# Altium PCB PCB1.PcbDoc
Units mil, origin at the board's own origin, x right, y up, seen from the top; angles counter-clockwise.
Board outline 2736.79 x 3920.6 mil, 2 copper layers (Top Layer, Bottom Layer); 85 components, 49 nets, 253 pads, 32 vias.
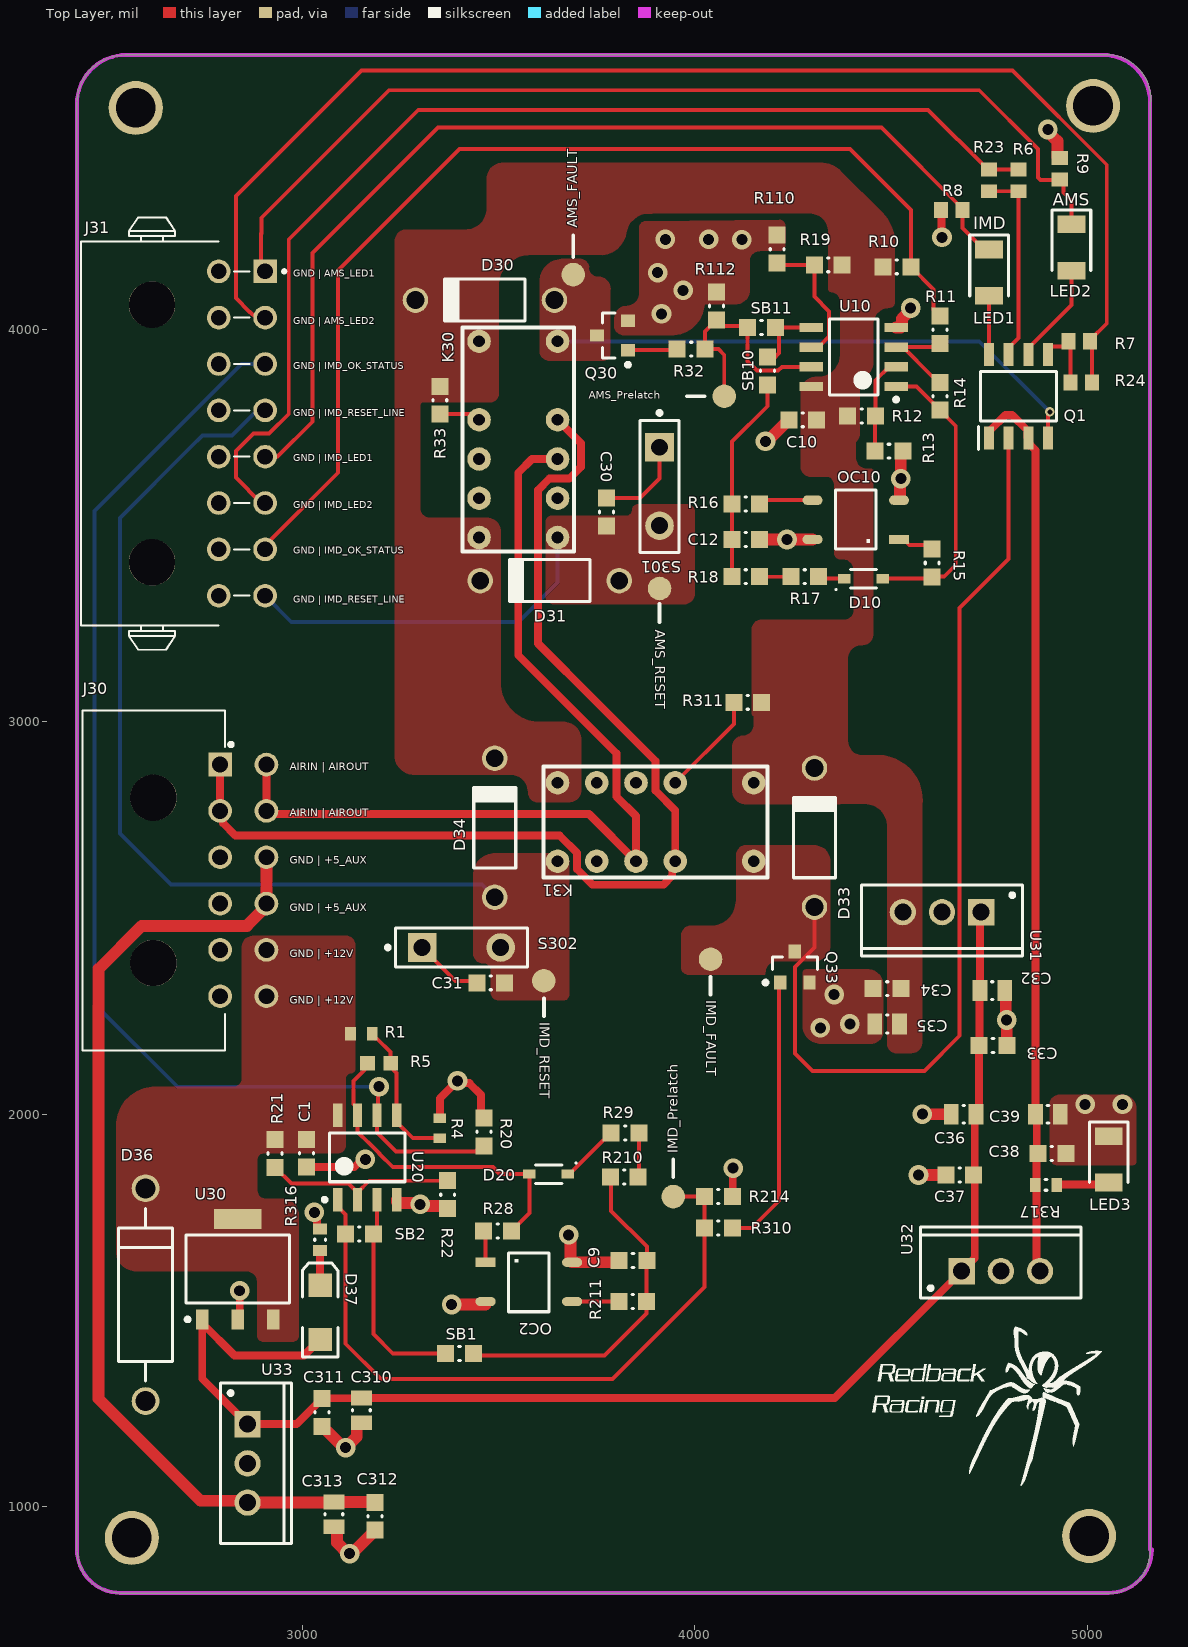
[diagram p0: Top Layer view]
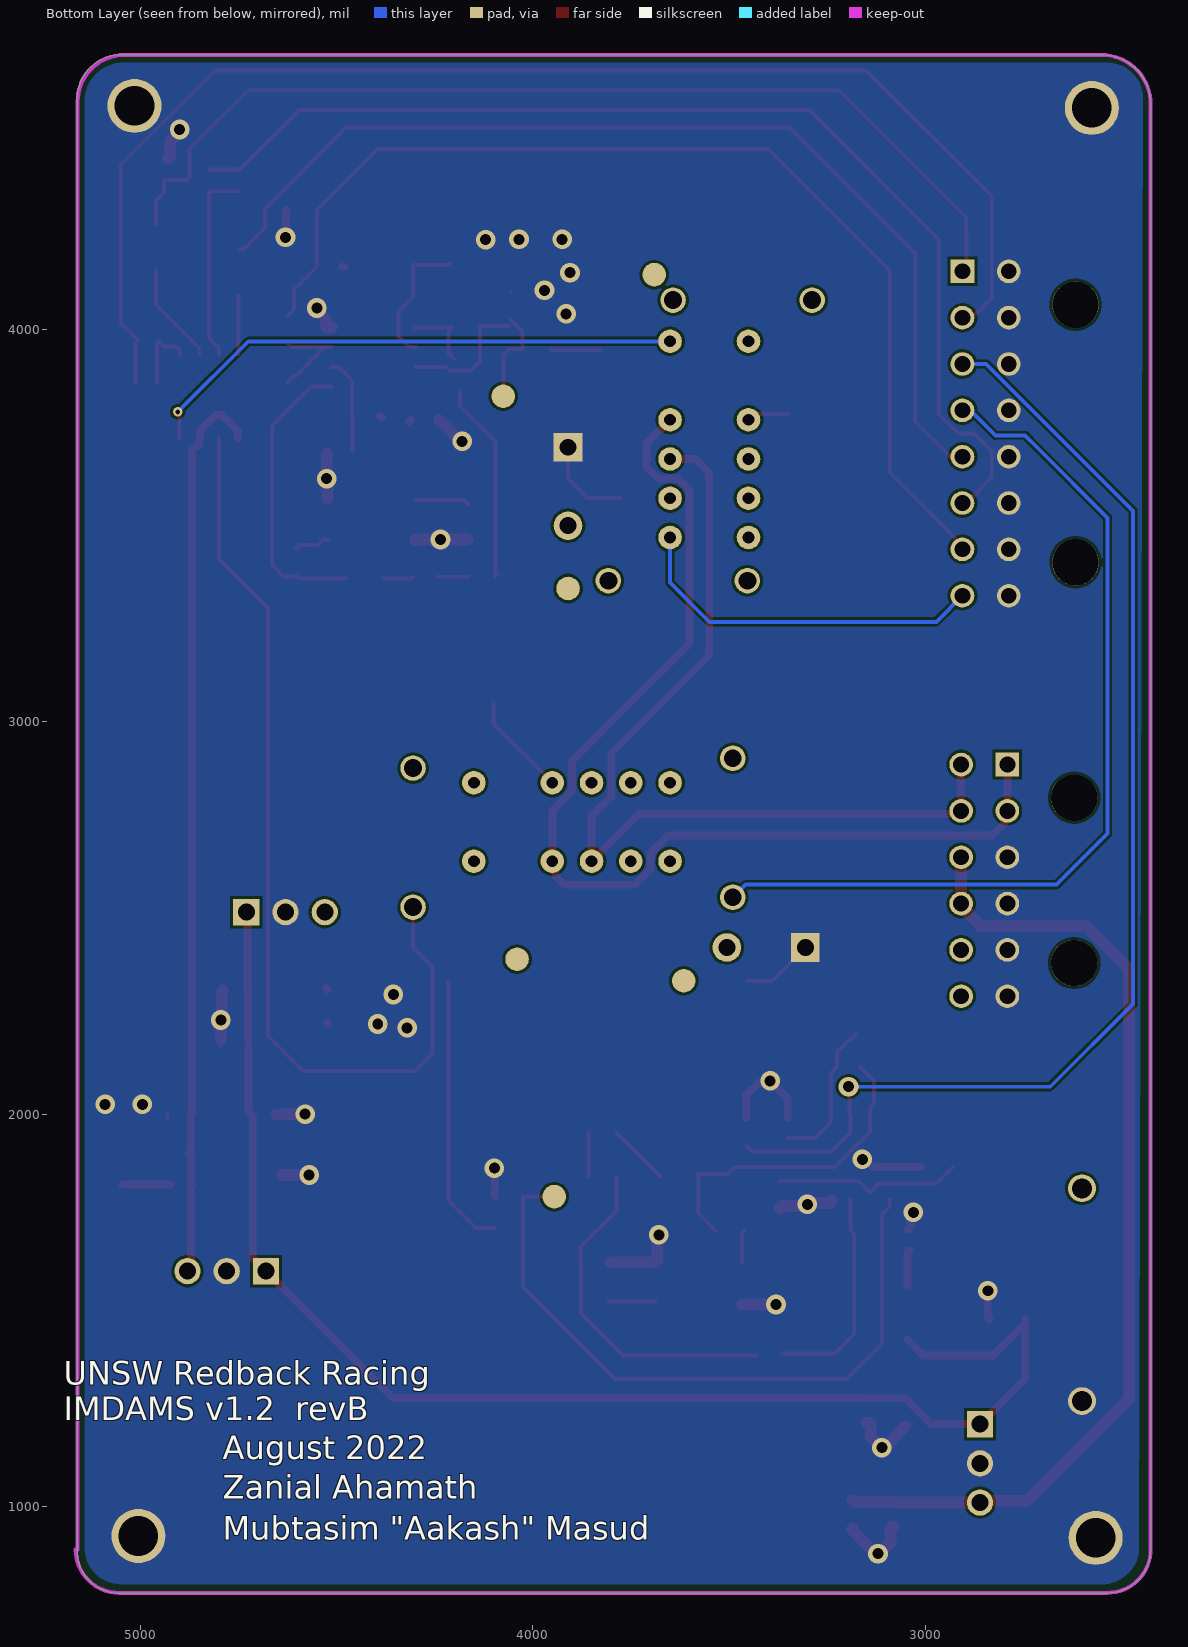
[diagram p1: Bottom Layer view, seen from below]

## Layer stack, top to bottom
Top Solder: solder mask 0.4, Solder Resist, Dk 3.5
Top Layer: signal copper 1.4
Dielectric 1: dielectric 12.6, FR-4, Dk 4.8
Bottom Layer: signal copper 1.4
Bottom Solder: solder mask 0.4, Solder Resist, Dk 3.5

## Board outline
2548.75,4700 ccw(c2548.74,4576.25) 2424.99,4576.24 2425,890 ccw(c2535.6,889.99) 2535.6,779.4 5060,779.4 ccw(c5054.94,884.94) 5160.49,890 5161.21,4576.24 ccw(c5048.74,4587.53) 5060,4700

## Design rules (kind name [scope] priority, off if disabled: settings)
BoardOutlineClearance [All] p1: gap=7.87 ignorepadtopadclearanceinfootprint=FALSE
Clearance [All] p1: gap=6 ignorepadtopadclearanceinfootprint=FALSE except(7: SMDPad-Fill SMDPad-Poly SMDPad-Region THPad-Fill THPad-Poly THPad-Region Via-Fill Via-Poly Via-Region Fill-Fill Fill-Poly Fill-Region Poly-Poly Poly-Region Region-Region)
DiffPairsRouting [All] p1: maxlimit=10 minlimit=6 mostfreqgap=6.3 toplayer_minwidth=5.98 toplayer_maxwidth=15 toplayer_prefwidth=6.3 bottomlayer_minwidth=5.98 bottomlayer_maxwidth=15 bottomlayer_prefwidth=6.3 maxuncoupledlength=500
Height [All] p1: minheight=0 maxheight=1500 prefheight=500
HoleSize [All] p1: absolutevalues=TRUE maxlimit=248.03 minlimit=11.81 maxpercent=80.000 minpercent=20.000
HoleToHoleClearance [All] p1: gap=6.3 allowstackedmicrovias=TRUE
MinimumAnnularRing [All] p1: minimumring=5.91
MinimumSolderMaskSliver [All] p1: minsoldermaskwidth=8.66
NetAntennae [All] p1: netantennaetolerance=1
PlaneClearance [All] p1: clearance=21
PlaneConnect PlaneConnectPowerPads [InPadClass('PowerPads')] p1: planeconnectstyle=Direct reliefexpansion=20 reliefentries=4 reliefconductorwidth=10 reliefairgap=10
PlaneConnect [All] p2: planeconnectstyle=Relief reliefexpansion=20 reliefentries=4 reliefconductorwidth=10 reliefairgap=10
PolygonConnect PolygonConnectPowerPads [All vs (InPadClass('PowerPads'))] p1: connectstyle=Direct reliefconductorwidth=10 reliefentries=4 polygonreliefangle="90 Angle" airgapwidth=10
PolygonConnect [All] p2: connectstyle=Direct reliefconductorwidth=10 reliefentries=4 polygonreliefangle="90 Angle" airgapwidth=10
RoutingVias [All] p1: holewidth=12 width=24 viastyle="Through Hole" minholewidth=6 minwidth=9.84 maxholewidth=28 maxwidth=50
SilkToSilkClearance [All] p1: silktosilkclearance=7.87
SilkToSolderMaskClearance [IsPad] p1: minsilkscreentomaskgap=5.91 clearancetoexposedcopper=TRUE
SolderMaskExpansion [All] p1: expansion=4 istentingtop=FALSE
UnConnectedPin [All] p1:
UnRoutedNet [All] p1: checkbadconnections=TRUE
Width "Schematic Width Constraint_1" [InNet('12V_FUSED')] p1: maxlimit=150 minlimit=20 preferedwidth=150 toplayer_prefwidth=20 bottomlayer_minwidth=150 minimp=50.000000 maximp=50.000000 favimp=50.000000
Width "Schematic Width Constraint" [InNet('+12')] p2: maxlimit=78.74 minlimit=78.74 preferedwidth=78.74 minimp=50.000000 maximp=50.000000 favimp=50.000000
Width [All] p3: maxlimit=196.85 minlimit=6.3 preferedwidth=7 minimp=50.000000 maximp=50.000000 favimp=50.000000
19 further rules are at their usual default settings.

## Classes and differential pairs
component class "[3] Latch-Connector_Stage": C30 C31 C32 C33 C34 C35 C36 C37 C38 C39 C310 C311 C312 C313 D30 D31 D33 D34 D36 D37 J30 J31 K30 K31 LED1 LED2 LED3 Q1 Q30 Q33 R6 R7 R8 R9 R23 R24 R32 R33 R310 R311 R316 R317 S301 S302 U30 U31 U32 U33
component class "[2] IMD_Input_Stage": C1 C9 D20 OC2 R1 R4 R5 R20 R21 R22 R28 R29 R210 R211 R214 SB1 SB2 U20
component class "[1] AMS_Input_Stage": C10 C12 D10 OC10 R10 R11 R12 R13 R14 R15 R16 R17 R18 R19 R110 R112 SB10 SB11 U10

## Components (designator, comment, footprint, x,y, rotation, side; value= is the part's Value field where it differs from the comment)
C1 "100n 0603" CAPC0603(1608)100_M 3010,1900.43 r270 top value=100nF
C9 "10u 0603" CAPC0603(1608)100_M 3842.28,1627.38 r180 top value=10uF
C10 "100n 0603" CAPC0603(1608)100_M 4275,3770 r180 top value=100nF
C12 "10u 0603" CAPC0603(1608)100_M 4130,3465 r0 top value=10uF
C30 "100n 0603" CAPC0603(1608)100_M 3775,3535 r270 top
C31 "100n 0603" CAPC0603(1608)100_M 3480,2335 r0 top
C32 "CAP 10uF 6.3V 0805(2012)" CAPC0805(2012)145_L 4758.5,2315 r180 top value=10uF
C33 "100n 0603" CAPC0603(1608)100_M 4760,2175 r180 top
C34 "100n 0603" CAPC0603(1608)100_M 4490,2320 r0 top
C35 "CAP 10uF 6.3V 0805(2012)" CAPC0805(2012)145_L 4490,2230 r0 top value=10uF
C36 "CAP 10uF 6.3V 0805(2012)" CAPC0805(2012)145_L 4685,2000 r0 top value=10uF
C37 "100n 0603" CAPC0603(1608)100_M 4675,1845 r0 top
C38 "100n 0603" CAPC0603(1608)100_M 4910,1900 r180 top
C39 "CAP 10uF" CAPC0805(2012)145_L 4900,2000 r180 top value=10uF
C310 "CAP 10uF 6.3V 0805(2012)" CAPC0805(2012)145_L 3150,1245 r90 top value=10uF
C311 "100n 0603" CAPC0603(1608)100_M 3050,1240 r90 top
C312 "100n 0603" CAPC0603(1608)100_M 3185,975 r90 top
C313 "CAP 10uF 6.3V 0805(2012)" CAPC0805(2012)145_L 3080,980 r90 top value=10uF
D10 "BAT60A" INF-SOD323_V 4430,3365 r90 top
D20 "BAT60A" INF-SOD323_V 3627.28,1847.38 r270 top
D30 "1N4742A" FAIR-DO-41-2_V 3465,4075 r180 top
D31 "1N4742A" FAIR-DO-41-2_V 3630,3360 r180 top
D33 "1N4742A" FAIR-DO-41-2_V 4305,2705 r90 top
D34 "1N4742A" FAIR-DO-41-2_V 3490,2730 r90 top
D36 "1N5353BG" ONSC-SURMETIC40-2-017AA-01 2600,1540 r270 top
D37 "LED2" 3.2X1.6X1.1 3045,1495 r90 top
J30 "4-794618-2" *TE_4-794618-2 2849.06,2595.94 r270 top
J31 "4-794618-6" *TE_4-794618-6 2670,3735 r270 top
K30 "V23079B1201B301" "V23079B1201B301 DPDT" 3450,3970 r270 top
K31 "V23079B1201B301" "V23079B1201B301 DPDT" 4150,2845 r180 top
LED1 "APTD3216SURCK" LEDC3216X200N 4750,4145 r270 top
LED2 "APTD3216SURCK" LEDC3216X200N 4960,4209.06 r270 top
LED3 "APTD3216SURCK" LEDC3216X200N 5055,1885 r270 top
OC2 "CPC1117NTR" "SOP-4 (CPC1117NTR)" 3466.7,1622.38 r0 top
OC10 "CPC1117NTR" "SOP-4 (CPC1117NTR)" 4520.47,3465 r180 top
Q1 "DMP4025LSD-13" SOIC127P600X175-8N 4825,3830 r90 top
Q30 "2N7002LT1G" ONSC-SOT-23-3-318-08_V 3790,3985 r180 top
Q33 "2N7002LT1G" ONSC-SOT-23-3-318-08_V 4255,2375 r90 top
R1 "12k" RESC1608X55X25NL10T15 3150,2205 r0 top
R4 "27k" RESC1608X55X25LL10T15 3350,1964.41 r270 top
R5 "47k" RESC1608X55X30NL15T15 3195,2130 r180 top
R6 "100R 0603" RESC1609X50X30ML8T20 4825,4380 r270 top
R7 "100R 0603" RESC1609X50X30ML8T20 4980,3970 r180 top
R8 "100R 0603" RESC1609X50X30ML8T20 4655,4305 r0 top
R9 "100R 0603" RESC1609X50X30ML8T20 4930,4410 r270 top
R10 "2K2 0603" CAPC0603(1608)100_M 4515,4160 r0 top value=2K2
R11 "2.2K 0603" CAPC0603(1608)100_M 4625,3999.57 r270 top value=10K
R12 "10k 0603" CAPC0603(1608)100_M 4425,3780 r180 top value=6K2
R13 "10K 0603" CAPC0603(1608)100_M 4495,3690 r180 top value=10K
R14 "10K 0603" CAPC0603(1608)100_M 4625,3830 r270 top value=100K
R15 "2K2 0603" CAPC0603(1608)100_M 4605,3405 r90 top value=2K2
R16 "10K 0603" CAPC0603(1608)100_M 4130,3555 r180 top value=10K
R17 "390K 0603" CAPC0603(1608)100_M 4280,3370 r180 top value=390K
R18 "0R 0603" CAPC0603(1608)100_M 4130,3370 r180 top value=0R
R19 "6K2 0603" CAPC0603(1608)100_M 4340,4165 r180 top value=6K2
R20 "2K2 0603" CAPC0603(1608)100_M 3462.6,1955 r90 top value=2K2
R21 "6K2 0603" CAPC0603(1608)100_M 2930,1900 r270 top value=6K2
R22 "10K 0603" CAPC0603(1608)100_M 3370,1795 r270 top value=10K
R23 "100R 0603" RESC1609X50X30ML8T20 4750,4380 r270 top
R24 "100R 0603" RESC1609X50X30ML8T20 4985,3865 r180 top
R28 "2K2 0603" CAPC0603(1608)100_M 3497.17,1702.38 r180 top value=2K2
R29 "390K 0603" CAPC0603(1608)100_M 3822.17,1952.38 r0 top value=390K
R32 "10R 0603" CAPC0603(1608)100_M 3990.43,3950 r180 top value=10R
R33 "0R 0603 Option" CAPC0603(1608)100_M 3350,3820 r90 top value=100k
R110 "10K 0603" CAPC0603(1608)100_M 4210,4205 r90 top value=10K
R112 "100K 0603" CAPC0603(1608)100_M 4055,4060 r90 top value=100K
R210 "0R 0603" CAPC0603(1608)100_M 3820,1840 r180 top value=0R
R211 "10K 0603" CAPC0603(1608)100_M 3841.74,1522.38 r0 top value=10K
R214 "100K 0603" CAPC0603(1608)100_M 4060,1790 r0 top value=100K
R310 "10R 0603" CAPC0603(1608)100_M 4060,1710 r0 top
R311 "0R 0603 Option" CAPC0603(1608)100_M 4135,3050 r0 top value=100k
R316 "2R94 1% 0603(1608)" RESC0603(1608)_L 3045,1680 r270 top value="2.94 Ohm"
R317 "100" RESC0603(1608)_L 4895,1820 r180 top value="2.94 Ohm"
S301 "SPST-2" SPST-2 3910,3600 r270 top
S302 "SPST-2" SPST-2 3405,2425 r0 top
SB1 "0R 0603" CAPC0603(1608)100_M 3400,1390 r180 top value=Bridge
SB2 "0R 0603" CAPC0603(1608)100_M 3145,1695 r180 top value=Bridge
SB10 "0R 0603" CAPC0603(1608)100_M 4185,3894.57 r90 top value=Bridge
SB11 "0R 0603" CAPC0603(1608)100_M 4170,4005 r180 top value=Bridge
U10 "LM2903YDT" ONSC-SOIC-8-751-07_V 4405,3930 r180 top
U20 "LM2903YDT" ONSC-SOIC-8-751-07_V 3165,1890 r90 top
U30 "ISP452" INF-SOT223_L 2835,1605 r90 top
U31 "L78S05CV" TO220 4630,2515 r180 top
U32 "L78S05CV" TO220 4780,1600 r0 top
U33 "L78S05CV" TO220 2860,1110 r270 top

## Footprints (in the part's own frame and the unit in brackets; to place one, negate y for a bottom-side part, rotate by r counter-clockwise, add the part's x,y. Pads: shape width x height; smd on the part's side, far side on the other; paste and mask are expansions set on the pad)
3.2X1.6X1.1 [mm] "SMT LED; 2 Flat Leads"
  rect 1.5x1.5 smd: 1(-1.75,0) 2(1.75,0)
  silkscreen extent -2.9,-1.15 3.2,1.15
*TE_4-794618-2 [mm]
  rect 1.53x1.53 hole 1.02: 1(-7.5,-1.5)
  round 1.53 hole 1.02: 2(-7.5,1.5) 3(-4.5,-1.5) 4(-4.5,1.5) 5(-1.5,-1.5) 6(-1.5,1.5) 7(1.5,-1.5) 8(1.5,1.5) 9(4.5,-1.5) 10(4.5,1.5) 11(7.5,-1.5) 12(7.5,1.5)
  round 3 hole 3 unplated: None(-5.35,-5.82) None(5.35,-5.82)
  silkscreen extent -11,-10.42 11,-0.68
*TE_4-794618-6 [mm]
  rect 1.53x1.53 hole 1.02: 1(-10.5,5.96)
  round 1.53 hole 1.02: 2(-10.5,2.96) 3(-7.5,5.96) 4(-7.5,2.96) 5(-4.5,5.96) 6(-4.5,2.96) 7(-1.5,5.96) 8(-1.5,2.96) 9(1.5,5.96) 10(1.5,2.96) 11(4.5,5.96) 12(4.5,2.96) 13(7.5,5.96) 14(7.5,2.96) 15(10.5,5.96) 16(10.5,2.96)
  round 3 hole 3 unplated: None(-8.34,-1.36) None(8.34,-1.36)
  silkscreen extent -14,-5.96 14,7.3
CAPC0603(1608)100_M [mm] "Chip Capacitor, Body 1.6x0.8mm, Height 1.0mm, IPC Low Density"
  rect 1.1x1.1 smd: 1(-0.9,0) 2(0.9,0)
  silkscreen extent -0.05,-0.45 0.05,0.45, body extent -0.87,-0.47 0.88,0.48, height 1
CAPC0805(2012)145_L [mm] "Chip Capacitor, Body 2.0x1.2mm, Height 1.45mm, IPC High Density"
  rect 0.95x1.35 smd: 1(-0.8,0) 2(0.8,0)
  silkscreen extent -0.05,-0.58 0.05,0.58, body extent -1.1,-0.72 1.1,0.72, height 1.45
FAIR-DO-41-2_V [mm] "2-Leads, Axial leaded, Body 2.72x5.2mm, Pin Spacing 9mm"
  round 1.65 hole 1.15: 1(-4.5,0) 2(4.5,0)
  silkscreen extent -2.6,-1.36 2.6,1.36, body extent -4.93,-1.36 4.93,1.36, height 2.71
INF-SOD323_V [mm] "SOD, 2-Leads, Body 1.7x1.25 mm"
  rect 0.6x0.8 smd: 1(0,1.25) 2(0,-1.25)
  silkscreen extent -0.76,-0.85 0.6,1.83, body extent -0.63,-0.85 0.63,0.85, height 1.1
INF-SOT223_L [mm] "SOT223, 4-Leads, Body 6.5x3.5mm, Pitch 2.3mm, IPC High Density"
  rect 1.3x0.8 smd: 1(-3.25,2.3) 2(-3.25,0) 3(-3.25,-2.3)
  rect 1.3x3.1 smd: 4(3.25,0)
  silkscreen extent -3.37,-3.35 2.2,3.37, body extent -1.85,-3.35 1.85,3.35, height 1.7
LEDC3216X200N [mm]
  rect 1.15x1.8 smd: 1(-1.5,0) 2(1.5,0)
  silkscreen extent -2.42,-1.25 1.5,1.25
ONSC-SOIC-8-751-07_V [mm] "SOIC, 8-Leads, Body 4.9x3.9mm, Pitch 1.27mm"
  rect 1.52x0.6 smd: 1(-2.74,1.905) 2(-2.74,0.635) 3(-2.74,-0.635) 4(-2.74,-1.905) 5(2.74,-1.905) 6(2.74,-0.635) 7(2.74,0.635) 8(2.74,1.905)
  silkscreen extent -2.87,-2.45 1.58,2.88, body extent -1.95,-2.45 1.95,2.45, height 1.75
ONSC-SOT-23-3-318-08_V [mm] "SOT23, 3-Leads, Body 2.92x1.3mm, Pitch 0.95mm"
  rect 0.9x0.8 smd: 1(-1,0.95) 2(-1,-0.95) 3(1,0)
  silkscreen extent -1.13,-1.46 0.65,2.02, body extent -0.65,-1.46 0.65,1.46, height 1.11
ONSC-SURMETIC40-2-017AA-01 [mm] "AXIAL, 2-Leads, Diameter 3.49mm"
  round 1.8 hole 1.3: 1(-6.887,0) 2(6.887,0)
  silkscreen extent -5.59,-1.75 5.59,1.75
RESC0603(1608)_L [mm] "Chip Resistor, Body 1.6x0.8mm, IPC High Density"
  rect 0.7x0.9 smd: 1(-0.7,0) 2(0.7,0)
  silkscreen extent -0.05,-0.35 0.05,0.35, body extent -0.85,-0.47 0.85,0.47, height 0.6
RESC1608X55X25LL10T15 [mm] "Chip Resistor, 2-Leads, Body 1.60x0.80mm, IPC High Density"
  rect 0.6x0.8 smd: 1(-0.65,0) 2(0.65,0)
  body extent -0.85,-0.45 0.85,0.45, height 0.55
RESC1608X55X25NL10T15 [mm] "Chip Resistor, 2-Leads, Body 1.70x0.90mm, IPC Medium Density"
  rect 0.7x0.9 smd: 1(-0.7,0) 2(0.7,0)
  body extent -0.85,-0.45 0.85,0.45, height 0.55
RESC1608X55X30NL15T15 [mm] "Chip Resistor, 2-Leads, Body 1.75x0.95mm, IPC Medium Density"
  rect 0.95x0.95 smd: 1(-0.75,0) 2(0.75,0)
  body extent -0.87,-0.48 0.87,0.48, height 0.55
RESC1609X50X30ML8T20 [mm] "Chip Resistor, 2-Leads, Body 1.65x0.95mm, IPC Low Density"
  rect 0.9x1.05 smd: 1(-0.7,0) 2(0.7,0)
  body extent -0.82,-0.48 0.82,0.48, height 0.5
SOIC127P600X175-8N [mm]
  rect 1.5x0.65 smd: 1(-2.7,1.905) 2(-2.7,0.635) 3(-2.7,-0.635) 4(-2.7,-1.905) 5(2.7,-1.905) 6(2.7,-0.635) 7(2.7,0.635) 8(2.7,1.905)
  silkscreen extent -3.45,-2.45 1.6,2.58, body extent -3,-2.45 3,2.45, height 1.75
"SOP-4 (CPC1117NTR)" [mm]
  rect 1.3x0.6 smd: 1(0,0)
  oval 1.3x0.6 smd: 2(0,-2.54) 3(5.6,-2.54) 4(5.6,0)
  silkscreen extent 1.48,-3.2 4.12,0.61
SPST-2 [mm] "Switch; 2 Leads"
  rect 1.85x1.85 hole 1.1: 1(-2.54,0)
  round 1.85 hole 1.1: 2(2.54,0)
  silkscreen extent -4.89,-1.27 4.28,1.27
TO220 [mm] "TO, Thru-Hole, Vertical, Heatsink Mounted; 3 In-Line Leads; Pitch 2.54 mm"
  rect 1.7x1.7 hole 1.1: 1(-2.54,0)
  round 1.7 hole 1.1: 2(0,0) 3(2.54,0)
  silkscreen extent -5.2,-1.75 5.2,2.85, body extent -5.25,-1.8 5.25,2.9, height 19.7
"V23079B1201B301 DPDT" [mil] "V23079B1201B301 DPDT"
  round 60 hole 30: 1(0,0) 3(200,0) 4(300,0) 5(400,0) 6(500,0) 7(500,200) 8(400,200) 9(300,200) 10(200,200) 12(0,200)
  silkscreen extent -35,-42 535,242

## Part data
C1 C9 C10 C12: library part Cap, "Capacitor", LatestRevisionDate=17-Jul-2002, LatestRevisionNote="Re-released for DXP Platform.", PackageDescription="Radial Cap, Thru-Hole; 2 Leads; 0.3 in Pin Spacing", PackageReference=RAD-0.3, Published=8-Jun-2000, Publisher="Altium Limited"
C30 C31 C33 C34 C37 C38 C311 C312: library part CAP, Parameter 1=100n
C32 C35 C36 C39 C310 C313: library part CMP-1036-04915-1, "CAP 10uF 6.3V ±10% 0805 (2012 Metric) Thickness 1.45mm SMD", Case-EIA=0805, Case-Metric=2012, Rated Voltage="6.3 V", Tolerance=Â±10%, Max Thickness="1.45 mm", Technology=SMT
D10 D20: library part CMP-1183-00008-2, "Silicon Schottky Diode, -55 to 85 degC, SOD323, Reel, Green", Manufacturer=Infineon, ComponentLink1Description="Manufacturer URL", ComponentLink1URL=http://www.infineon.com/, ComponentLink2Description=Datasheet, ComponentLink2URL=http://www.infineon.com/dgdl/bat60aseries.pdf?folderId=db3a304313d846880113def5812204a1&fileId=db3a304313d846880113def70c9304a9, ComponentLink3Description="Package Specification", ComponentLink3URL=http://www.infineon.com/dgdl/SOT323-Package_Overview.pdf?folderId=db3a30431936bc4b0119533e1dcb3c92&fileId=db3a30431936bc4b011953495f283cb1, Configuration=Single, CT (max)="35Â pF", Green=TRUE, IF (max)="3,000Â mA", Mounting Technology="Surface Mount", PackageDescription="3-Pin Small Outline Transistor Package, 1.25 x 2 mm Body, 0.65 mm Pitch", PackageReference=SOT323, Packing=Reel, PartNumber=BAT60A, VF (max)="370Â mV", VR (max)="10Â V"
D30 D31 D33 D34: library part CMP-0892-00001-1, "Zener Diode, 12V, 1W, 5%, -65 to 200 degC, 2-Pin DO-41, Body 2.72 x 5.2 mm, RoHS", Manufacturer="Fairchild Semiconductor", Operating and Storage Temperature Range="-65 to 200 degC", Test Current IZ (mA)=21, Tolerance=5%, ComponentLink1Description="Manufacturer URL", ComponentLink1URL=http://www.fairchildsemi.com/, ComponentLink2Description=Datasheet, ComponentLink2URL=http://www.fairchildsemi.com/ds/1N/1N4744A.pdf, ComponentLink3Description="Package Specification", ComponentLink3URL=http://www.fairchildsemi.com/dwg/DO/DO41A.pdf, DatasheetVersion="Rev. H3", IR (uA)=5, Mounting Technology="Through Hole", PackageDescription="2-Pin Axial leaded, Body 2.72 x 5.2 mm, Lead Spread 25.4 mm", PackageReference=DO-41-2, PackageVersion="Rev. 2", PartNumber=1N4742A, PD (W)=1, RoHS=TRUE, VZ (Max.) (V)=12.6, VZ (Min.) (V)=11.4, ZZ (Max) (ohm)=8
D36: library part CMP-1060-01290-1, "5 W Zener Voltage Regulator, 2-Pin Surmetic(TM) 40, Pb-Free, Bulk Box", Manufacturer="On Semiconductor", ComponentLink1Description="Manufacturer URL", ComponentLink1URL=http://www.onsemi.com/, ComponentLink2Description=Datasheet, ComponentLink2URL=http://www.onsemi.cn/pub_link/Collateral/1N5333B-D.PDF, ComponentLink3Description="Package Specification", ComponentLink3URL=http://www.onsemi.cn/pub_link/Collateral/017AA.PDF, DatasheetVersion="Rev. 14", Mounting Technology="Through Hole", P Max (W)=5, PackageDescription="2-Pin, Axial Lead, Diameter 3.49 mm", PackageReference=SURMETIC40-2-017AA-01, PackageVersion="Rev. O, 09/2005", Packing="Bulk Box", PartNumber=1N5353BG, RoHS=Pb-Free, VZ Typ (V)=16
D37: "Typical RED, GREEN, YELLOW, AMBER GaAs LED", LatestRevisionDate=17-Jul-2002, LatestRevisionNote="Re-released for DXP Platform.", PackageDescription="SM LED; 2 Flat Leads", PackageReference=3.2X1.6X1.1, PackageVersion=Feb-2002, Published=8-Jun-2000, Publisher="Altium Limited"
J30: "Wire-To-Board Connector, Micro Mate-N-Lok Series, Through Hole, Header, 12, 3 Mm", Package=None, Availability=Unavailable, EU_RoHS_Compliance=Compliant, MF="TE Connectivity", MP=4-794618-2, Price=None, SnapEDA_Link=https://www.snapeda.com/parts/4-794618-2/TE%20Connectivity%20AMP%20Connectors/view-part/?ref=snap, TE_purchase_URL=https://www.te.com/usa-en/product-4-794618-2.html?te_bu=Cor&te_type=disp&te_campaign=seda_glo_cor-seda-global-disp-prtnr-fy19-seda-model-bom-cta_sma-317_1&elqCampaignId=32493
J31: "Wire-To-Board Connector, Right Angle, Micro Mate-N-Lok Series, Through Hole, Header, 16, 3 Mm", Package=None, Availability=Unavailable, MF="TE Connectivity", MP=4-794618-6, Price=None, SnapEDA_Link=https://www.snapeda.com/parts/4-794618-6/TE%20Connectivity%20AMP%20Connectors/view-part/?ref=snap, TE_purchase_URL=https://www.te.com/usa-en/product-4-794618-6.html?te_bu=Cor&te_type=disp&te_campaign=seda_glo_cor-seda-global-disp-prtnr-fy19-seda-model-bom-cta_sma-317_1&elqCampaignId=32493
K30 K31: "V23079B1201B301 DPDT"
LED1 LED2 LED3: "LED", Manufacturer_Name=Kingbright, Mouser Part Number=604-APTD-3216SURCK, Arrow Part Number=APTD3216SURCK, Arrow Price/Stock=https://www.arrow.com/en/products/aptd3216surck/kingbright, Datasheet Link=https://www.mouser.de/ProductDetail/Kingbright/APTD3216SURCK?qs=85uWm5%252BqJhUBFMUPeH99Jg%3D%3D, Height=2mm, Manufacturer_Part_Number=APTD3216SURCK, Mouser Price/Stock=https://www.mouser.co.uk/ProductDetail/Kingbright/APTD3216SURCK?qs=85uWm5%252BqJhUBFMUPeH99Jg%3D%3D
Q1: "MOSFET (P-Channel)", Manufacturer_Name="Diodes Inc.", Mouser Part Number=621-DMP4025LSD-13, Arrow Part Number=DMP4025LSD-13, Arrow Price/Stock=https://www.arrow.com/en/products/dmp4025lsd-13/diodes-incorporated, Datasheet Link=https://ms.componentsearchengine.com/Datasheets/2/DMP4025LSD-13.pdf, Height=1.75mm, Manufacturer_Part_Number=DMP4025LSD-13, Mouser Price/Stock=https://www.mouser.co.uk/ProductDetail/Diodes-Incorporated/DMP4025LSD-13?qs=gfe7vQ8txpWs%252BZpALpt3%252Bg%3D%3D
Q30 Q33: library part CMP-1058-00781-1, "Small Signal MOSFET, 60 V, 115 mA, N-Channel, 3-Pin SOT-23, Pb-Free, Tape and Reel", Manufacturer="On Semiconductor", Package Type=SOT-23-3, Channel Polarity="N Channel", ComponentLink1Description="Manufacturer URL", ComponentLink1URL=http://www.onsemi.com/, ComponentLink2Description=Datasheet, ComponentLink2URL=http://www.onsemi.com/pub_link/Collateral/2N7002L-D.PDF, ComponentLink3Description="Package Specification", ComponentLink3URL=http://www.onsemi.cn/pub_link/Collateral/318-08.PDF, Configuration=Single, DatasheetVersion="Rev. 7", ID Max (A)=0.115, Mounting Technology="Surface Mount", PackageDescription="3-Pin Small Outline Transistor, Body 2.92 x 1.3 mm, Pitch 0.95 mm", PackageReference=SOT-23-3-318-08, PackageVersion="Rev. AP, 11/2009", Packing="Tape and Reel", PartNumber=2N7002LT1G, RoHS=Pb-Free, V(BR)DSS Min (V)=60, VGS Max (V)=20, VGS(th) Max (V)=2.5
R1: library part CMP-1659-00047-1, "Chip Resistor, 12 KOhm, +/- 1%, 100 mW, -55 to 155 degC, 0603 (1608 Metric), RoHS, Tape and Reel", Case Code (Imperial)=0603, Case Code (Metric)=1608, Max Operating Temperature="155 degC", Min Operating Temperature="-55 degC", Package Quantity=5000, Power Rating="100 mW", Resistance="220 kohm", Tolerance=1%, Voltage Rating="50 V", Case\Package=0603, ComponentLink1Description="Manufacturer URL", ComponentLink1URL=http://www.yageo.com/, ComponentLink2Description=Datasheet, ComponentLink2URL=http://www.yageo.com/documents/recent/PYu-RC_Group_51_RoHS_L_04.pdf, DatasheetVersion="Rev. 4, 02/2016", Height="0.45 mm", Length="1.6 mm", Mount="Surface Mount", PackageDescription="2-Pin Surface Mount Device, Body 1.6 x 0.8 mm", PackageReference=0603, Packaging="Tape and Reel", Pins=2, REACH SVHC="No SVHC", RoHSCompliant=true, Voltage Rating (DC)="50 V", Width="0.8 mm"
R4: library part CMP-2000-06933-1, "Chip Resistor, 27 KOhm, +/- 1%, 0.1 W, -55 to 155 degC, 0603 (1608 Metric), RoHS, Tape and Reel", Case Code - in=0603, Case Code - mm=1608, Manufacturer=Yageo, Operating Temperature Range=-55Cto+155C, Package Description="2-Pin Surface Mount Device, Body 1.6 x 0.8 mm", Power Rating=100mW, Resistance=27kOhms, Temperature Coefficient=100PPM/C, Tolerance=1%, Voltage Rating=50V, Datasheet URL=http://www.yageo.com/documents/recent/PYu-RC_Group_51_RoHS_L_7.pdf, Datasheet Version="Rev. 7, 05/2017", Manufacturer URL=http://www.yageo.com/, Mounting Technology=SurfaceMount, Package Reference=0603, Packaging=Reel, Product=ThickFilmResistorsGeneralPurpose, Series=RC, Termination Style=SMD/SMT
R5: library part CMP-2000-00523-2, "Chip Resistor, 47 KOhm, +/- 1%, 0.1 W, -55 to 155 degC, 0603 (1608 Metric), RoHS, Tape and Reel", Case Code (Imperial)=0603, Case Code (Metric)=1608, Colour=Red, Forward Current="20 mA", Forward Voltage="2.1 V", Max Operating Temperature="100 degC", Min Operating Temperature="-40 degC", Package Quantity=3000, Power Rating="90 mW", Case\Package=0603, ComponentLink1Description="Manufacturer URL", ComponentLink1URL=http://www.panasonic.com/, ComponentLink2Description=Datasheet, ComponentLink2URL=http://industrial.panasonic.com/cdbs/www-data/pdf/RDA0000/AOA0000C86.pdf, DatasheetVersion=Apr-15, Height="0.6 mm", Illumination Colour=Red, Length="1.6 mm", Lens Style=Clear, Luminous Intensity="63 mcd", Mount="Surface Mount", Nominal Vf="2.1 V", Nominal Wavelength="639 nm", PackageDescription="2-Pin Surface Mount Device, Body 1.6 x 0.85 mm", PackageReference=0603, Packaging="Tape and Reel", Pins=2, Radiation Hardening=No, REACH SVHC="No SVHC", RoHSCompliant=true, Viewing Angle="160 degrees", Width="0.8 mm"
R6 R7 R8 R9 R23 R24: library part CMP-2000-03824-5, "Chip Resistor, 100 Ohm, +/- 1%, 100 mW,-55 to 155 degC, 0603 (1608 Metric), RoHS, Tape and Ree", Manufacturer="Vishay Semiconductor", ComponentLink1Description="Manufacturer URL", ComponentLink1URL=http://www.vishay.com/, ComponentLink2Description=Datasheet, ComponentLink2URL=http://www.vishay.com/docs/20035/dcrcwe3.pdf, DatasheetVersion=06/2012, Mounting Technology="Surface Mount", PackageDescription="2-Pin Surface Mount Device, Body 1.575 x 0.85 mm", PackageReference=0603
R10 R11 R12 R13 R14 R15 R16 R17 R18 R19 R20 R21 R22 R28 R29 R32 R110 R112 R210 R211 R214 R310 SB1 SB2 SB10 SB11: library part Res1, "Resistor", LatestRevisionDate=17-Jul-2002, LatestRevisionNote="Re-released for DXP Platform.", PackageDescription="Axial Device, Thru-Hole; 2 Leads; 0.3 in Pin Spacing", PackageReference=AXIAL-0.3, Published=8-Jun-2000, Publisher="Altium Limited"
R33 R311: library part RES
R316 R317: library part CMP-1012-00222-1, "2R94 0.1W 1% 0603 (1608 Metric)  SMD", Case-EIA=0603, Case-Metric=1608, Power="0.1 W", Tolerance="1 %", Technology=SMT
S301 S302: library part SW-PB, "Switch", LatestRevisionDate=17-Jul-2002, LatestRevisionNote="Re-released for DXP Platform.", PackageDescription="Switch; 2 Leads", PackageReference=SPST-2, Published=24-Mar-1999, Publisher="Altium Limited"
U10 U20: library part CMP-1305-00052-1, "JL 10/9/19: LM2903DR2G model used. / Low Offset Voltage Dual Comparators, 2 to 36 V, -40 to 105 degC, 8-Pin SOIC, Pb-Free, Tape and Reel", Manufacturer="On Semiconductor", PartNumber=LM2903DR2G, ComponentLink1Description="Manufacturer URL", ComponentLink1URL=http://www.onsemi.com/, ComponentLink2Description=Datasheet, ComponentLink2URL=http://www.onsemi.com/pub_link/Collateral/LM393-D.PDF, ComponentLink3Description="Package Specification", ComponentLink3URL=http://www.onsemi.com/pub_link/Collateral/751-07.PDF, DatasheetVersion="Rev. 25", ICC Typ (mA)=0.4, IO Typ (mA)=16, Mounting Technology="Surface Mount", PackageDescription="8-Pin Small Outline Integrated Circuit, Body 4.9 x 3.9 mm, Pitch 1.27 mm", PackageReference=SOIC-8-751-07, PackageVersion="Rev. AK, 02/2011", Packing="Tape and Reel", RoHS=TRUE, VCC Max (V)=36, VCC Min (V)=2
U30: library part CMP-1095-00141-1, "Smart Power High-Side-Switch for Industrial Applications, 5 to 34 V Operating, -30 to 85 degC, SOT223, Reel, Green", Load Current (typ)="0.7Â A", Manufacturer=Infineon, Operating Voltage Range (max)="34 V", Operating Voltage Range (min)="5 V", Channels=1, ComponentLink1Description="Manufacturer URL", ComponentLink1URL=http://www.infineon.com/, ComponentLink2Description=Datasheet, ComponentLink2URL=http://www.infineon.com/dgdl/ISP452_20060301.pdf?folderId=db3a304412b407950112b408e8c90004&fileId=db3a304412b407950112b42957ef40c3, ComponentLink3Description="Package Specification", ComponentLink3URL=http://www.infineon.com/dgdl/SOT223-Package_Overview.pdf?folderId=db3a30431936bc4b0119530470b03c3d&fileId=db3a30431936bc4b0119531d40b93c5c, Green=TRUE, IL (nom)min - all channels active="0.7Â A", IL (nom)min - one channel active="0.8Â A", IL (SC)="1.5Â A", IL (SCp)="1.5Â A", Mounting Technology="Surface Mount", PackageDescription="4-Pin Small Outline Transistor Package, 6.5 x 3.5 mm Body, 2.3 mm Pitch", PackageReference=SOT223, PackageVersion=Apr-08, Packing=Reel, PartNumber=ISP452, Ptot (max)="1.8Â W", RON (max) @ Tj max="400 mOhm", RON @ 25 degC="200 mOhm (max)", toff (max)="150 us", ton (max)="100 us"
U31 U32 U33: library part CMP-0244-00436-1, "2A Positive Voltage Regulator, 5V, 3-Pin TO-220", ComponentLink1Description="Manufacturer URL", ComponentLink1URL=http://www.st.com, ComponentLink2Description=Datasheet, ComponentLink2URL=http://www.st.com/internet/com/TECHNICAL_RESOURCES/TECHNICAL_LITERATURE/DATASHEET/CD00000449.pdf, ComponentLink3Description="Package Specification", ComponentLink3URL=http://www.st.com/internet/com/TECHNICAL_RESOURCES/TECHNICAL_LITERATURE/PACKAGE_INFORMATION/CD00004649.pdf, DatasheetVersion=1/03/2010, PackageDescription="TO, Thru-Hole, Vertical, Heatsink Mounted; 3 In-Line Leads; Pitch 2.54 mm", PackageReference=TO220, PackageVersion=ver3.0

## Free pads (board coordinates)
  round 137.8 hole 100.98: 5(2565,920) 5(2575,4565) 5(5005,925) 5(5015,4570)
  round 60 all layers, no hole: 6(3615,2340) 7(4040,2395) 8(3945,1790) 9(3910,3340) 10(3690,4140) 11(4075,3830)

## Via types
v1: diameter 50, hole 28, Top Layer to Bottom Layer, 31 vias
v2: diameter 24.02, hole 12.01, Top Layer to Bottom Layer, 1 vias

## Nets (pads, with @x,y where several pads share a name; then routed paths per layer and width w, separated by ;. In a path a pad name is that pad's centre, name@x,y a point inside that pad or via, vN(x,y) a via of type N, cw(c..) or ccw(c..) an arc to the next point about the centre after c; other vN are vias at no path point)
12V_FUSED: C32.2 C33.2 C36.2 C37.2 C310.2 C311.2 D37.1 U30.1 U31.1 U32.1 U33.1 | length 3576.5
  Top Layer w20: U30.1 U30.1@2744.45,1467.2 ; D37.1 3003.9,1385 2826.65,1385 U30.1@2744.45,1467.2 ; C33.2 4724.57,2008.07 4713.46,1996.97 4713.46,1845 4713.46,1633.46 U32.1 4356.5,1276.5 C310.2 3149.47,1275.96 3050.53,1275.96 C311.2 2984.57,1210 U33.1 2744.45,1325.55 U30.1@2744.45,1467.2 ; C33.2@4724.57,2190 4725.79,2191.22 4725.79,2313.78 C32.2 4727.01,2512.01 U31.1 4733.5,2518.5 4733.5,2519.77 cw(c4735,2515) U31.1@4735,2520
+5: C10.1 C34.2 C35.2 D30.2 D31.2 D33.2 D34.2 K30.1 K30.6 K31.1 K31.6 R10.1 R12.2 R19.1 R33.2 R311.2 U10.8 U31.3 | length 49.3
  Top Layer w20: D30.2 D30.2@3288.3,4074.53 ; K30.6 K30.6@3451.42,3468.58 ; D31.2@3451.42,3361.42 D31.2 ; D34.2@3484.74,2919.07 D34.2@3490,2924.33 ; C10.1 C10.1@4315,3765.43 ; R12.2@4385,3775.43 R12.2 ; R10.1 4485.43,4160 4480.43,4160 R10.1@4480,4159.57 ; C35.2@4520.96,2230.53 C35.2 C35.2@4523.46,2231.97 ; C34.2@4523.46,2318.03 C34.2 C34.2@4527.72,2322.28 ; U31.3@4527.72,2512.72 U31.3
+5_AUX: C312.2 C313.2 J30.6 J30.8 U33.3 | length 2530.8
  Top Layer w30: J30.6 J30.8 2908.11,2529.75 2858.36,2480 2590,2480 2480,2370 2480,1275 2740,1015 2855,1015 U33.3 C313.2@3080,1010 ; C313.2 3180.96,1011.5 C312.2@3184.89,1015.43
+5_LED: C38.2 C39.2 Q1.1 Q1.3 R317.2 U32.3 | length 2312.9
  Top Layer w20: Q1.1 4752.8,3726.5 4752.8,3743.23 4791.72,3782.15 4808.28,3782.15 4847.2,3743.23 4847.2,3726.5 Q1.3 4850,3706.97 4852.8,3704.17 4856.79,3704.17 4868.5,3692.46 C39.2 4871.54,1996.97 4871.54,1904.31 C38.2@4875.85,1900 ; C38.2 4871,1896.44 4871,1823.56 R317.2 4871.22,1816.22 4871.22,1608.78 U32.3
+12: C1.1 D36.1 J30.10 J30.12 R1.1 R21.1 U20.8 U30.3 U30.4
AIRIN: J30.1 J30.3 K30.10 K31.10 | length 2805.3
  Top Layer w20: J30.3@2790,2758.74 J30.1 ; J30.3@2793.48,2758.74 2797.7,2754.52 2797.7,2741.63 2829.33,2710 3655.71,2710 3700,2665.71 3700,2624.29 3739.29,2585 3920,2585 3942.57,2607.57 3942.57,2637.57 K31.10 3950,2774.29 3900,2824.29 3900,2900 3748.55,3051.45 3600,3200 3600,3590.71 3629.29,3620 3680,3620 3710,3650 3710,3710 K30.10
AIROUT: J30.2 J30.4 K30.9 K31.9 | length 2340.7
  Top Layer w20: J30.4@2908.11,2791.89 J30.2 ; J30.4@2910,2790 2908.11,2788.11 J30.4 2915.81,2765.41 2939.53,2765.41 2939.94,2765 3730,2765 K31.9 3850,2655.82 3850,2760 3800,2810 3800,2920 3550,3170 3550,3635 3585,3670 K30.9
AMS_FAULT: D30.1 K30.12 pad.10 Q1.4 Q30.3 | length 1432.7
  Top Layer w10: D30.1@3635,4067.83 cw(c3642.17,4067.83) D30.1 ; K30.12 cw(c3665,3970) K30.12@3665,3985 ; Q1.4 4900,3781.21 4905,3786.21 v2(4905,3790)
  Bottom Layer w10: K30.12 4725,3970 v2(4905,3790)
AMS_LED1: J31.1 LED2.1 R9.2 | length 2564
  Top Layer w10: J31.1@2894.65,4148.39 2894.65,4244.65 2895,4245 2895,4285 3220,4610 4725,4610 4875,4460 4875,4387.1 4880.86,4381.24 R9.2@4930,4381.24 ; R9.2@4940,4380 4940,4349.45 4960,4329.45 LED2.1
AMS_LED2: J31.3 R7.1 R24.1 | length 3364.8
  Top Layer w10: J31.3@2894.65,4030.28 2881.05,4030.28 2866.61,4044.72 2865.28,4044.72 2830,4080 2830,4340 3150,4660 4810,4660 5050,4420 5050,4015.39 5007.56,3972.95 R7.1 ; R24.1 R7.1@5012.56,3965
AMS_OK_Status: J31.13 R10.2 R11.1 | length 2745.3
  Top Layer w10: J31.13@2894.65,3439.72 3090,3635.08 3090,4150 3400,4460 4395,4460 4550.43,4304.57 R10.2 4608.35,4102.09 4608.35,4051.22 R11.1@4625,4034.57
AMS_Prelatch: pad.11 R32.1 R112.1 SB11.2 U10.7 | length 585.8
  Top Layer w10: R112.1 4025.87,3995.43 R32.1 4060,3950 4075,3935 pad.11 ; R112.1@4060,4009.13 4130.43,4009.13 SB11.2 4134.57,3918.74 4157.96,3895.35 4212.04,3895.35 4221.69,3905 U10.7
AMS_Reset_Line: C30.2 D31.1 J31.15 K30.7 pad.9 S301.2 | length 929.8
  Top Layer w10: D31.1@3806.85,3360.32 D31.1
  Bottom Layer w10: J31.15 2971.26,3255 3550,3255 3650,3355 K30.7
GND: C1.2 C9.2 C10.2 C12.2 C30.1 C31.1 C32.1 C33.1 C34.1 C35.1 C36.1 C37.1 C38.1 C39.1 C310.1 C311.1 C312.1 C313.1 D36.2 J30.5 J30.7 J30.9 J30.11 J31.2 J31.4 J31.6 J31.8 J31.10 J31.12 J31.14 J31.16 LED3.1 OC2.2 OC2.4 OC10.2 OC10.4 pad.5 Q30.2 Q33.2 R4.1 R8.1 R9.1 R13.1 R20.2 R22.2 R110.2 R112.2 R214.2 R316.1 S301.1 S302.1 U10.4 U20.4 U30.2 U31.2 U32.2 U33.2 | length 2657.8
  Top Layer w10: S302.1 3390,2340 C31.1@3452.98,2340 ; v1(3678.5,1692.38) v1@3682.84,1688.05 ; OC2.4@3682.84,1627.94 3682.22,1627.33 OC2.4 ; C30.1 3860.43,3570.43 3910,3620 S301.1 ; C9.2@3801.84,1622.38 C9.2 ; R112.2 R112.2@4055.43,4095 ; OC10.2 OC10.2@4522.74,3567.26 ; v1@4522.74,3617.74 v1(4525,3620) ; R13.1@4525,3684.57 R13.1 ; C33.1@4795,2175 C33.1 ; C39.1@4931.5,1992.13 C39.1
  Top Layer w20: U30.2 ccw(c2835,1482.05) 2840,1482.05 v1(2840,1550) ; C1.2 3131.88,1865 3151.88,1885 v1(3160,1885) ; v1(3030,1750) 3030,1741.88 3037.28,1734.6 3037.28,1711.34 3041.06,1707.56 R316.1 ; R4.1 3350,2040 v1(3395,2085) 3400.74,2079.26 3425.29,2079.26 3455,2049.55 R20.2@3455,1990.43 ; R214.2@4096.58,1791.15 v1@4096.58,1861.47 ; R8.1 4628.72,4303.72 4628.72,4236.28 v1(4630,4235)
  Top Layer w30: C311.1 3100.74,1153.83 3106.17,1153.83 v1(3110,1150) 3110.85,1150 3138.43,1177.57 3138.43,1209.8 3142.13,1213.5 C310.1 ; C313.1 3084.28,948.5 3087.98,944.8 3087.98,907.57 3115.56,880 v1(3120,880) 3126.17,886.17 3128.52,883.83 3129.26,883.83 3184.89,939.46 C312.1@3184.89,944.57 ; U20.4 3240,1777.02 3243.19,1773.83 3296.17,1773.83 v1(3300,1770) 3303.83,1766.17 3363.39,1766.17 R22.2 ; v1@3378.43,1516.57 v1(3380,1515) OC2.2@3466.7,1515 ; OC2.4@3682.84,1627.94 v1@3682.84,1688.05 ; OC2.4 C9.2@3801.84,1622.38 ; C12.2 OC10.4 ; v1(4180,3715) 4184.57,3715 C10.2 ; U10.4 4524.61,4005 4527.8,4008.19 4527.8,4027.38 4550,4049.59 v1(4550,4055) ; OC10.2@4522.74,3567.26 v1@4522.74,3617.74 ; v1(4525,3620) R13.1@4525,3684.57 ; v1(4570,1845) C37.1 ; v1(4580,2000) C36.1 ; C32.1 4792.5,2312.5 4792.5,2242.5 v1(4795,2240) C33.1@4795,2190.43 ; v1(4900,4510) 4900,4504.59 4924.33,4480.26 4924.33,4440.28 4927.05,4437.56 R9.1
  other v1: 4097.72,1862.62 4995,2025 5090,2025 4320,2220 4395,2230 4355,2305 4235,3465 3915,4040 3970,4100 3905,4145 4120,4229 3925,4230 4035,4230
IMD_FAULT: D33.1 K31.12 pad.7 Q1.2 Q33.3 | length 2444.9
  Top Layer w10: D33.1 4305,2425 4255,2375 4255,2155 4300,2110 4585,2110 4675,2200 4675,3290 4800,3415 Q1.2
IMD_LED1: J31.9 LED1.1 R8.2 | length 2612.4
  Top Layer w10: J31.9@2894.65,3675.94 J31.9 2935.94,3675.94 3025,3765 3025,4195 3345,4515 4475.51,4515 4682.56,4307.95 R8.2 4682.56,4258.7 4737.2,4204.06 LED1.1
IMD_LED2: J31.11 R6.1 R23.1 | length 2838.1
  Top Layer w10: J31.11@2894.65,3557.83 2830,3622.48 2830,3690 2875,3735 2915,3735 2965,3785 2965,4230 3295,4560 4594.61,4560 4747.05,4407.56 R23.1 R6.1
IMD_OK_Status: J31.5 R20.1 U20.6 | length 3068.8
  Top Layer w10: v1(3195,2070) 3192.5,2067.5 3192.5,2000.37 U20.6 3190,1952.95 3237.95,1905 3440.43,1905 R20.1@3455,1919.57
  Bottom Layer w10: J31.5 2844.69,3912.17 2470,3537.48 2470,2280.86 2680.86,2070 v1(3195,2070)
IMD_Prelatch: pad.8 R214.1 R310.1 SB2.2 U20.1 | length 1734.4
  Top Layer w10: U20.1 3090,1764.02 3109.57,1744.45 SB2.2 3110,1694.57 3110,1415 3200,1325 3790,1325 4024.57,1559.57 R310.1 R214.1 pad.8
IMD_Reset_Line: C31.2 D34.1 J31.7 K31.7 pad.6 S302.2 | length 2318.2
  Top Layer w10: D34.1@3490,2535 D34.1
  Bottom Layer w10: J31.7@2894.65,3794.06 2884.06,3794.06 2820,3730 2745,3730 2715.17,3700.17 2535,3520 2535,2715 2665,2585 3457.83,2585 D34.1
NetC9_1: C9.1 R210.2 R211.2 SB1.1 | length 877.9
  Top Layer w10: SB1.1@3430.35,1385 3770,1385 3876.59,1491.59 3876.59,1521.8 R211.2 C9.1@3877.17,1622.38 ; R210.2@3786.74,1841.13 3786.74,1753.26 3877.71,1662.29 C9.1 ; C9.1@3877.6,1622.38 C9.1@3877.6,1627.38
NetC12_1: C12.1 R16.2 R18.2 SB10.1 | length 507
  Top Layer w10: R18.2 C12.1 R16.2 4094.57,3714.13 4185,3804.57 SB10.1@4185,3839.57
NetD10_1: D10.1 R17.1 | length 77.4
  Top Layer w10: R17.1@4305.43,3370 4310.43,3365 D10.1
NetD10_2: D10.2 R14.2 R15.1 U10.1 | length 752.5
  Top Layer w10: D10.2@4475.28,3365 D10.2 4595,3365 4600.8,3370.8 4635.8,3370.8 4665,3400 4665,3754.57 R14.2 4564.57,3855 U10.1
NetD20_1: D20.1 R29.1 | length 157
  Top Layer w10: D20.1@3675.32,1842.38 3768.67,1935.73 3770.09,1935.73 R29.1
NetD20_2: D20.2 R5.2 R28.1 U20.7 | length 830.8
  Top Layer w10: R5.2@3165.47,2120 3130,2084.53 3130,2025.98 3140,2015.98 U20.7 3140,1955 3167.54,1927.46 3168.46,1927.46 3196,1899.91 3196,1899 3230,1865 3485,1865 3502.62,1847.38 D20.2 3578.06,1747.84 R28.1
NetD37_2: D37.2 R316.2 | length 97.5
  Top Layer w10: R316.2@3041.1,1648.54 cw(c3045,1648.54) R316.2
  Top Layer w20: R316.2@3040,1652.44 3041.22,1652.44 3045,1648.66 3045,1648.54 D37.2
NetK30_3: K30.3 R33.1 | length 108.3
  Top Layer w10: R33.1 3435.43,3784.57 cw(c3435.43,3770) K30.3
NetK31_3: K31.3 R311.1 | length 267
  Top Layer w10: K31.3 4099.57,2994.57 R311.1
NetLED1_2: LED1.2 Q1.8 | length 149.6
  Top Layer w10: Q1.8 LED1.2
NetLED2_2: LED2.2 Q1.6 | length 259.3
  Top Layer w10: Q1.6 4850,3953.03 4960,4063.03 LED2.2
NetLED3_2: LED3.2 R317.1 | length 123.6
  Top Layer w20: R317.1 4923.03,1820.47 LED3.2@5045.94,1820.47
NetOC2_1: OC2.1 R28.2 | length 82.1
  Top Layer w10: R28.2 3466.7,1697.42 OC2.1
NetOC2_3: OC2.3 R211.1 | length 119.1
  Top Layer w10: OC2.3 R211.1
NetOC10_1: OC10.1 R15.2 | length 95.6
  Top Layer w10: OC10.1 4534.25,3465 4541.06,3458.19 4541.06,3456.65 4546.92,3450.8 4594.64,3450.8 R15.2
NetOC10_3: OC10.3 R16.1 | length 138.7
  Top Layer w10: R16.1 4175.43,3565 OC10.3
NetQ1_5: Q1.5 R7.2 R24.2 | length 174.1
  Top Layer w10: Q1.5 4900,3949.49 4907.8,3957.28 4939.72,3957.28 R7.2 ; R24.2 R7.2@4957.44,3965
NetQ1_7: Q1.7 R6.2 R23.2 | length 501.5
  Top Layer w10: R23.2 R6.2 4825,3978.03 4800,3953.03 Q1.7
NetQ30_1: Q30.1 R32.2 | length 127
  Top Layer w10: Q30.1 3952.6,3947.6 ccw(c3952.6,3950) R32.2
NetQ33_1: Q33.1 R310.2 | length 705.3
  Top Layer w10: R310.2 4145,1710 4214.37,1779.37 4214.37,2332.4 Q33.1
NetR1_2: R1.2 R4.2 R5.1 U20.5 | length 370.4
  Top Layer w10: R1.2 3177.56,2201.06 3186.34,2192.28 3190.28,2192.28 3224.53,2158.03 R5.1 ; R5.1@3224.53,2120 3240,2104.53 3240,1979.76 3280.94,1938.82 R4.2
NetR11_2: R11.2 R14.1 U10.3 | length 247
  Top Layer w10: U10.3 U10.3@4530.98,3955 ; R14.1 4608.35,3882.09 4603.9,3882.09 U10.3@4530.98,3955 ; R11.2 4615.87,3955 U10.3@4530.98,3955
NetR12_1: R12.1 R13.2 U10.2 | length 247.7
  Top Layer w10: R13.2 4459.57,3779.13 R12.1 4460.43,3870.67 4494.76,3905 U10.2
NetR17_2: R17.2 R18.1 | length 79.1
  Top Layer w10: R18.1 R17.2
NetR19_2: R19.2 R110.1 U10.6 | length 351.2
  Top Layer w10: R110.1 4214.57,4165 R19.2 4304.57,4083.82 4342.05,4046.34 4342.05,3981.81 4315.24,3955 U10.6
NetR21_2: R21.2 R22.1 U20.2 | length 479.2
  Top Layer w10: R21.2 2971.52,1823.05 3117.19,1823.05 3140,1800.24 3170.2,1830.43 R22.1
NetR29_2: R29.2 R210.1 | length 111.3
  Top Layer w10: R210.1@3857.6,1841.13 R29.2
NetSB1_2: SB1.2 SB2.1 U20.3 | length 551.2
  Top Layer w10: U20.3 3190,1704.57 SB2.1 3180.43,1439.57 3230,1390 SB1.2
NetSB10_2: SB10.2 SB11.1 U10.5 | length 191.5
  Top Layer w10: SB10.2@4200,3925 4215,3940 4215,3995.43 SB11.1 U10.5 U10.5@4303.94,3998.19
pads on no net: J30.None J31.None K30.4 K30.5 K30.8 K31.4 K31.5 K31.8

## Polygon pours and split planes (outlines as drawn)
IMD_Reset_Line on Top Layer "IMD_RESET_LINE_L01_P069" (solid, pour order 69): 3490,2665 ccw(c3489.99,2610.01) 3435,2610 3435,2410 ccw(c3460,2410) 3460,2385 cw(c3460,2365) 3480,2365 3480,2310 ccw(c3500,2310) 3500,2290 3665,2290 ccw(c3665,2305) 3680,2305 3680,2515 3680,2640 ccw(c3655,2640) 3655,2665
AMS_Reset_Line on Top Layer "AMS_RESET_LINE_L01_P068" (solid, pour order 68): 3620,3510 3620,3320 ccw(c3640,3320) 3640,3300 3810,3300 3970,3300 ccw(c3972.5,3327.5) 4000,3325 4000,3535 ccw(c3980,3535) 3980,3555 3855,3555 ccw(c3854.99,3540.01) 3840,3540 cw(c3825.01,3539.99) 3825,3525 3635,3525 ccw(c3635,3510)
+5 on Top Layer "Top Layer-+5" (solid, pour order 91): 4095,2825 ccw(c4130,2825) 4130,2790 4205,2790 4355,2790 ccw(c4362.5,2940.01) 4370,2790 4440,2790 cw(c4435.01,2735.01) 4490,2730 4490,2180 ccw(c4514.99,2179.99) 4515,2155 4550,2155 ccw(c4550,2185) 4580,2185 4580,2790 ccw(c4465.01,2800.01) 4475,2915 4430,2915 cw(c4427.5,2952.5) 4390,2950 4390,3160 cw(c4425,3160) 4425,3195 ccw(c4425,3225) 4455,3225 4455,3640 ccw(c4450,3640) 4450,3645 4440,3645 cw(c4439.99,3674.99) 4410,3675 4410,3712.64 ccw(c4390.03,3734.98) 4420,3735 4420,3880 ccw(c4420,3915) 4455,3915 4455,4015 cw(c4495,4015) 4495,4055 ccw(c4495,4069.99) 4510,4070 4510,4210 ccw(c4400.06,4220.02) 4480.05,4296.11 4480.22,4296.27 4373.76,4402.73 ccw(c4320.04,4349.08) 4320.14,4425 4320,4425 3510,4425 ccw(c3510,4385) 3470,4385 3470,4310 cw(c3415.02,4309.98) 3415,4255 3265,4255 ccw(c3264.98,4225.02) 3235,4225 3235,3845 ccw(c3264.96,3845) 3235.15,3841.99 3235,3842.05 3235,3340 3235,3339.91 3235,2915 ccw(c3285,2915) 3285,2865 3530,2865 cw(c3530.01,2820.01) 3575,2820 ccw(c3600,2820) 3600,2795 3680,2795 ccw(c3680,2824.99) 3710,2825 3710,2955 ccw(c3665.01,2955.01) 3665,3000 3605,3000 cw(c3604.99,3099.99) 3505,3100 3505,3331.55 3504.83,3331.58 ccw(c3474.11,3334.78) 3505,3335 3505,3485 ccw(c3470.01,3485.01) 3470,3520 3325,3520 cw(c3324.99,3544.99) 3300,3545 3300,3805 cw(c3310,3805) 3310,3815 3480,3815 ccw(c3480,3835) 3500,3835 3500,4105 cw(c3579.99,4110) 3575,4190 3745,4190 ccw(c3757.5,4257.5) 3825,4245 cw(c3883.51,4236.49) 3892.05,4295 4295,4295 cw(c4295.01,4250.02) 4340,4250 4340,4105 ccw(c4349.99,4104.99) 4350,4095 cw(c4347.52,4072.51) 4370,4070 4370,3935 cw(c4315.02,3934.98) 4315,3880 4310,3880 ccw(c4310,3840) 4270,3840 4270,3715 4270.19,3713.04 4270,3713.01 4270,3650 ccw(c4295,3650) 4295,3625 4335,3625 cw(c4335,3605) 4355,3605 4355,3430 ccw(c4369.99,3429.99) 4370,3415 4375,3415 cw(c4375.01,3385.01) 4405,3385 4405,3285 cw(c4380.02,3284.98) 4380,3260 4170,3260 ccw(c4169.99,3235.01) 4145,3235 4145,3020 ccw(c4150,3020) 4150,3015 4150,2992.95 cw(c4122.05,2992.95) 4122.05,2965 4125,2965 ccw(c4124.98,2935.02) 4095,2935 4095,2870
AMS_FAULT on Top Layer "AMS_FAULT_L01_P070" (solid, pour order 70): 3660,4180 ccw(c3662.5,4122.5) 3605,4120 3605,3945 ccw(c3630,3945) 3630,3920 3765,3920 ccw(c3765,3940) 3785,3940 3785,4060 3785,4100 ccw(c3752.5,4102.5) 3755,4135 cw(c3752.49,4157.48) 3730,4155 ccw(c3707.5,4157.5) 3710,4180 3695,4180
IMD_FAULT on Top Layer "IMD_FAULT_L01_P092" (solid, pour order 92): 4130,2685 ccw(c4130,2660) 4105,2660 4105,2545 cw(c4040,2545) 4040,2480 3990,2480 ccw(c3990,2455) 3965,2455 3965,2375 ccw(c3985,2375) 3985,2355 4175,2355 ccw(c4175,2360) 4180,2360 cw(c4210,2360) 4210,2390 4305,2390 ccw(c4305,2430) 4345,2430 4345,2645 ccw(c4305,2645) 4305,2685
GND on Top Layer "Top Layer-GND" (solid, pour order 58): 4024.85,4065 4105,4065 ccw(c4105,4100) 4140,4100 4140,4175 cw(c4165,4175) 4165,4200 4215,4200 ccw(c4215,4215) 4230,4215 4230,4265 ccw(c4215,4265) 4215,4280 3874.12,4275.88 ccw(c3874.12,4260) 3858.24,4260 3858.24,4093.24 cw(c3825,4093.23) 3825,4060 ccw(c3824.99,4030.01) 3795,4030 3795,4010 ccw(c3820,4010) 3820,3985 3940,3985 ccw(c3940,4070)
GND on Top Layer "GND_L01_P097" (solid, pour order 97): 4930,2050 ccw(c4930,2025) 4905,2025 4905,1890 ccw(c4925,1890) 4925,1870 5115,1870 ccw(c5115,1880) 5125,1880 5125,2015 ccw(c5090,2015) 5090,2050
GND on Top Layer "GND_L01_P095" (solid, pour order 95): 4440,2370 cw(c4440,2330) 4480,2330 4480,2210 cw(c4450,2210) 4450,2180 4320,2180 cw(c4320,2225) 4275,2225 4275,2360 cw(c4285,2360) 4285,2370
+12 on Top Layer "Top Layer-+12" (solid, pour order 74): 2525,1650 ccw(c2575,1650) 2575,1600 2855,1600 cw(c2855,1570) 2885,1570 2885,1435 ccw(c2900,1435) 2900,1420 2975,1420 ccw(c2975,1435) 2990,1435 2990,1745 ccw(c2950,1745) 2950,1785 2905,1785 cw(c2905,1805) 2885,1805 2885,1885 cw(c2900,1885) 2900,1900 3090,1900 ccw(c3090,1920) 3110,1920 3110,2090 cw(c3125,2090) 3125,2105 ccw(c3125,2115) 3135,2115 3135,2430 ccw(c3110,2430) 3110,2455 2875,2455 ccw(c2875,2425) 2845,2425 2845,2090 cw(c2825,2090) 2825,2070 2625,2070 ccw(c2625,1970) 2525,1970 2525,1825
GND on Bottom Layer "GND_L02_P094" (solid, pour order 94): 2535,4680 ccw(c2535,4590) 2445,4590 2455,890 ccw(c2550.6,897.5) 2558.1,801.9 5045,801.9 ccw(c5049.05,894.05) 5141.2,890 5141.2,4590 ccw(c5043.1,4581.9) 5035,4680

## Keep-outs
Keep-Out Layer:
  lines w10: 5160,890 5160,4579.96 ccw(c5040.04,4579.96) 5040.04,4699.92 3140,4700 2550,4700 ccw(c2550,4575) 2425,4575 2425,890 ccw(c2535,890) 2535,780 5055,780 ccw(c5055,890) 5165,890

## Silkscreen, mask and mechanical layers (free items; w line width, h text height)
Top Overlay:
  drawing of 24 lines, arcs and shapes, not listed
  text "AMS" at 4911.72,4315.92 h31.5
  text "AMS_FAULT" at 3700.83,4260 h25 r90
  text "IMD" at 4709.34,4255.92 h31.5
  text "GND | AMS_LED1" at 2976,4134 h18
  text "GND | AMS_LED2" at 2976,4014 h18
  text "GND | IMD_OK_STATUS" at 2976,3899 h18
  text "AMS_Prelatch" at 3730,3823.33 h20
  text "GND | IMD_RESET_LINE" at 2976,3779 h18
  text "GND | IMD_LED1" at 2976,3664 h18
  text "GND | IMD_LED2" at 2976,3544 h18
  text "GND | IMD_OK_STATUS" at 2976,3429 h18
  text "GND | IMD_RESET_LINE" at 2976,3304 h18
  text "AMS_RESET" at 3899.17,3235 h25 r270
  text "AIRIN | AIROUT" at 2967,2877 h20
  text "AIRIN | AIROUT" at 2967,2759.33 h20
  text "GND | +5_AUX" at 2967,2638.33 h20
  text "GND | +5_AUX" at 2967,2517.33 h20
  text "GND | +12V" at 2967,2399.67 h20
  text "IMD_FAULT" at 4029.17,2290 h25 r270
  text "GND | +12V" at 2967,2282 h20
  text "IMD_RESET" at 3604.17,2235 h25 r270
  text "IMD_Prelatch" at 3955.83,1900 h25 r90
Bottom Overlay:
  text "UNSW Redback Racing / IMDAMS v1.2  revB" at 5194.72,1220 h60
  text "August 2022" at 4789.72,1119.99 h60
  text "Zanial Ahamath" at 4789.72,1020 h60
  text "Mubtasim \"Aakash\" Masud" at 4789.72,915 h60

## Dimensions
5295,4695 to 5300,785 on Top Overlay
2415,4620 to 5165,4655 on Top Overlay